# Altium PCB CurrentTrans-board-multi.PcbDoc
Units mil, origin at the board's own origin, x right, y up, seen from the top; angles counter-clockwise.
Board outline 4937.01 x 9323.82 mil, 2 copper layers (Top Layer, Bottom Layer); 11 components, 11 nets, 55 pads, 0 vias.
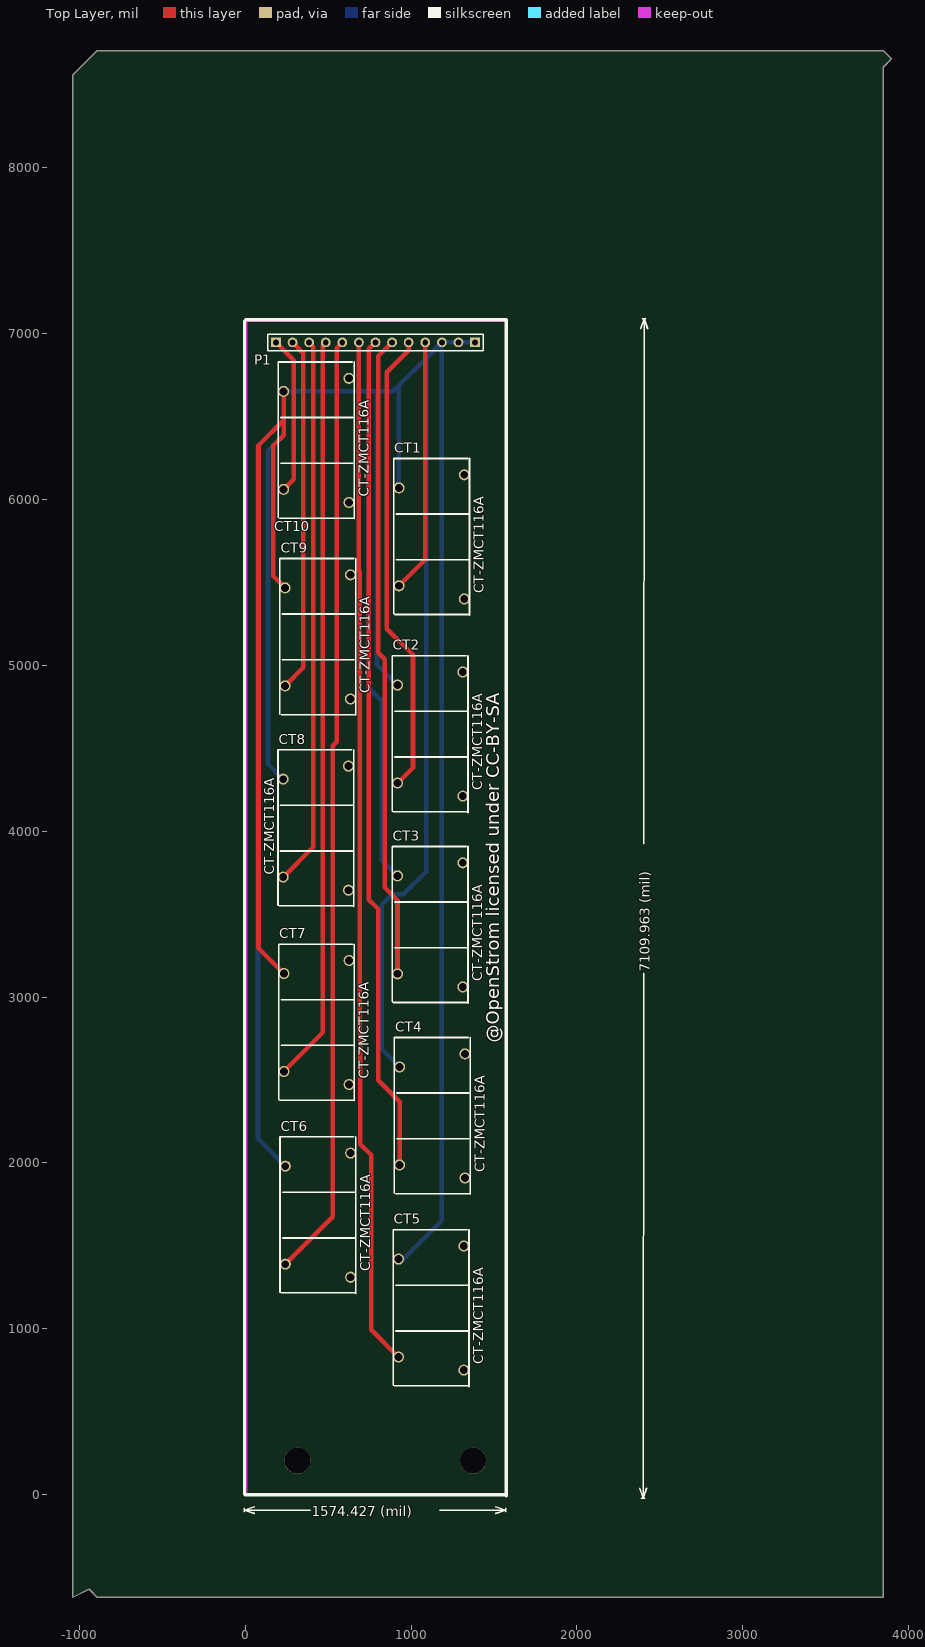
[diagram p0: Top Layer view]
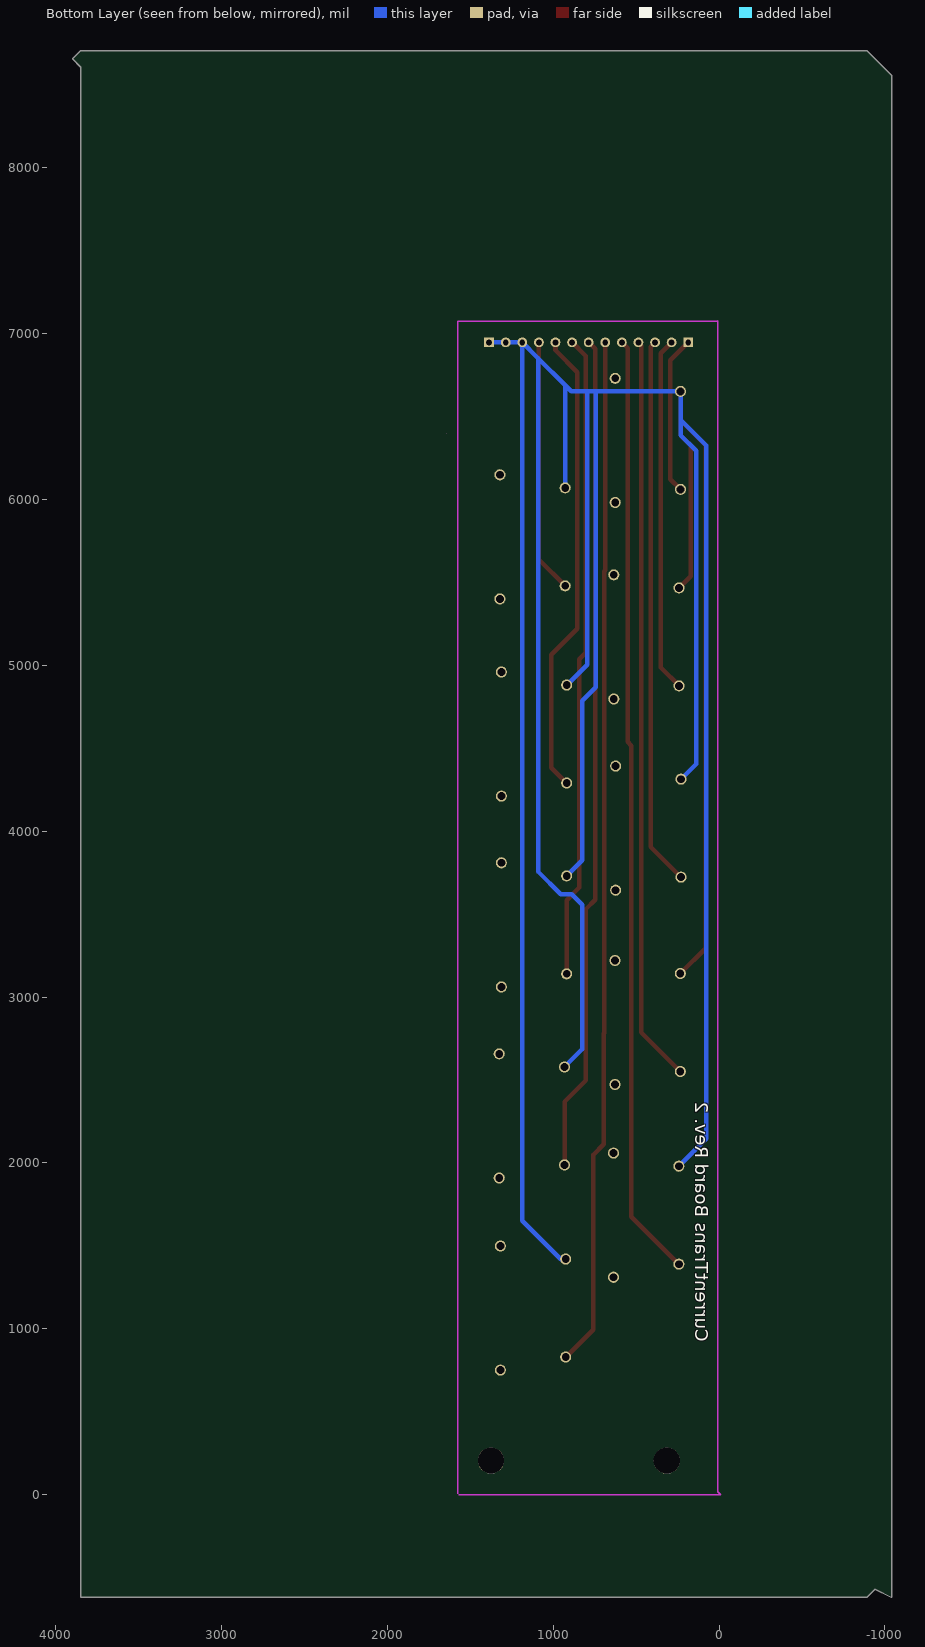
[diagram p1: Bottom Layer view, seen from below]

## Layer stack, top to bottom
Top Layer: signal copper 1.4
Dielectric: dielectric 12.6, FR-4, Dk 4.8
Bottom Layer: signal copper 1.4

## Board outline
-940.04,-569.61 -890.83,-618.82 3846.38,-618.82 3846.38,8604.61 3896.57,8654.8 3846.38,8705 -890.83,8705 -1040.43,8555.39 -1040.43,-618.82

## Design rules (kind name [scope] priority, off if disabled: settings)
Clearance [All] p1: gap=10
PolygonConnect [All] p1: connectstyle=Relief reliefconductorwidth=10 reliefentries=4 polygonreliefangle="90 Angle" airgapwidth=10
RoutingVias [All] p1: holewidth=28 width=50 viastyle="Through Hole" minholewidth=28 minwidth=50 maxholewidth=28 maxwidth=50
SilkToSilkClearance [All] p1 off: silktosilkclearance=10
SilkToSolderMaskClearance [IsPad] p1 off: minsilkscreentomaskgap=10 clearancetoexposedcopper=TRUE
SolderMaskExpansion [All] p1: expansion=4
Width [All] p1: maxlimit=78.74 minlimit=10 preferedwidth=27.56
26 further rules are at their usual default settings.

## Components (designator, comment, footprint, x,y, rotation, side; value= is the part's Value field where it differs from the comment)
CT1 "CurrentTransf" CT-ZMCT124 927.09,5478.62 r90 top
CT2 "CurrentTransf" CT-ZMCT124 918.23,4289.65 r90 top
CT3 "CurrentTransf" CT-ZMCT124 918.23,3140.04 r90 top
CT4 "CurrentTransf" CT-ZMCT124 931.02,1988.46 r90 top
CT5 "CurrentTransf" CT-ZMCT124 924.13,830 r90 top
CT6 "CurrentTransf" CT-ZMCT124 242.05,1390.04 r90 top
CT7 "CurrentTransf" CT-ZMCT124 233.19,2551.46 r90 top
CT8 "CurrentTransf" CT-ZMCT124 229.25,3722.72 r90 top
CT9 "CurrentTransf" CT-ZMCT124 240.63,4875.75 r90 top
CT10 "CurrentTransf" CT-ZMCT124 231.93,6060.04 r90 top
P1 "Header 13" HDR1X13 1385.63,6946.3 r180 top

## Footprints (in the part's own frame and the unit in brackets; to place one, negate y for a bottom-side part, rotate by r counter-clockwise, add the part's x,y. Pads: shape width x height; smd on the part's side, far side on the other; paste and mask are expansions set on the pad)
CT-ZMCT124 [mm] "current transformer"
  round 1.7 hole 1.2: 1(0,0) 2(15,0) 3(-2,-10) 4(17,-10)
  silkscreen extent -4.5,-10.8 19.5,0.8, body extent -4.63,-10.93 19.63,0.93, height 21
HDR1X13 [mm] "Connector; Header; 13 Position"
  rect 1.5x1.5 hole 0.9: 1(0,0) 13(30.48,0)
  round 1.5 hole 0.9: 2(2.54,0) 3(5.08,0) 4(7.62,0) 5(10.16,0) 6(12.7,0) 7(15.24,0) 8(17.78,0) 9(20.32,0) 10(22.86,0) 11(25.4,0) 12(27.94,0)
  silkscreen extent -1.27,-1.27 31.75,1.27

## Part data
P1: "Header, 13-Pin"

## Free pads (board coordinates)
  round 157.48 hole 157.48: 0(314.96,205.98) 0(1374.02,205.98)

## Nets (pads, with @x,y where several pads share a name; then routed paths per layer and width w, separated by ;. In a path a pad name is that pad's centre, name@x,y a point inside that pad or via, vN(x,y) a via of type N, cw(c..) or ccw(c..) an arc to the next point about the centre after c; other vN are vias at no path point)
NetCT1_1: CT1.1 P1.4 | length 1533.3
  Top Layer w27.56: CT1.1 1085.63,5637.17 P1.4
NetCT1_2: CT1.2 CT2.2 CT3.2 CT4.2 CT5.2 CT6.2 CT7.2 CT8.2 CT9.2 CT10.2 P1.1 P1.2 P1.3 | length 28570.6
  Top Layer w27.56: CT10.2 231.93,6475.67 ; CT7.2 80.63,3294.57 80.63,6324.37 231.93,6475.67 ; CT9.2 170.63,5536.3 170.63,6324.3 231.93,6385.6 231.93,6475.67
  Bottom Layer w27.56: CT8.2 137.72,4404.8 137.72,6292.6 231.93,6386.81 231.93,6478.62 ; CT6.2 77.68,2144.96 77.68,6324.37 231.93,6478.62 ; CT3.2 823.42,3825.4 823.42,4785.39 742.05,4866.77 742.05,6650.59 ; CT2.2 794.72,5003.7 794.72,6648.11 792.24,6650.59 ; CT5.2 953.66,1420.55 1185.63,1652.52 P1.3 ; CT1.2 927.09,6687.76 ; CT4.2 823.42,2686.62 823.42,3555.39 886.73,3618.7 952.99,3618.7 1090.73,3756.44 1090.73,6851.4 ; P1.1 P1.2 P1.3 ; 231.93,6478.62 CT10.2 742.05,6650.59 ; 742.05,6650.59 792.24,6650.59 ; 792.24,6650.59 889.92,6650.59 927.09,6687.76 ; 927.09,6687.76 1090.73,6851.4 ; 1090.73,6851.4 P1.3
NetCT2_1: CT2.1 P1.5 | length 2815
  Top Layer w27.56: CT2.1 1011.73,4383.15 1011.73,5062.28 854.25,5219.76 854.25,6766.02 985.63,6897.4 P1.5
NetCT3_1: CT3.1 P1.6 | length 3888
  Top Layer w27.56: P1.6 803.23,6863.9 803.23,5075.63 842.44,5036.42 842.44,3660.43 918.23,3584.65 CT3.1
NetCT4_1: CT4.1 P1.7 | length 5050.9
  Top Layer w27.56: P1.7 745.98,6906.65 745.98,3586.61 802.09,3530.51 802.09,2499.02 931.02,2370.08 CT4.1
NetCT5_1: CT5.1 P1.8 | length 6215.1
  Top Layer w27.56: P1.8 685.63,5571.3 691.63,5565.3 691.63,2782.3 693.63,2780.3 693.63,2113.65 758.92,2048.37 758.92,995.22 CT5.1
NetCT6_1: CT6.1 P1.9 | length 5698.6
  Top Layer w27.56: CT6.1 528.63,1676.62 528.63,4515.3 551.1,4537.77 551.1,6911.77 P1.9
NetCT7_1: CT7.1 P1.10 | length 4499.4
  Top Layer w27.56: CT7.1 468.43,2786.69 468.43,6929.09 P1.10
NetCT8_1: CT8.1 P1.11 | length 3309.7
  Top Layer w27.56: CT8.1 411.34,3904.8 411.34,6920.59 P1.11
NetCT9_1: CT9.1 P1.12 | length 2143.6
  Top Layer w27.56: CT9.1 351.3,4986.42 351.3,6880.63 P1.12
NetCT10_1: CT10.1 P1.13 | length 956.6
  Top Layer w27.56: P1.13 293.63,6838.3 293.63,6121.74 CT10.1
pads on no net: CT1.3 CT1.4 CT2.3 CT2.4 CT3.3 CT3.4 CT4.3 CT4.4 CT5.3 CT5.4 CT6.3 CT6.4 CT7.3 CT7.4 CT8.3 CT8.4 CT9.3 CT9.4 CT10.3 CT10.4

## Keep-outs
Keep-Out Layer:
  lines w7.87: 1567.91,0.98 -9.84,0.98 8.86,19.69 8.86,7077.76 14.76,7071.85 1574.8,7071.85 1574.8,7.87 ; 1639.69,6399.61 1639.69,6399.61

## Silkscreen, mask and mechanical layers (free items; w line width, h text height)
Top Overlay:
  lines w7.87: -3.94,7074.8 2.95,7081.69
  lines w10: -4.41,-102.95 -4.41,-82.95 ; 55.59,-112.95 -4.41,-92.95 ; 55.59,-72.95 -4.41,-92.95 ; 391.92,-92.95 -4.41,-92.95 ; 1173.68,-92.95 1570.02,-92.95 ; 1510.02,-112.95 1570.02,-92.95 ; 1510.02,-72.95 1570.02,-92.95 ; 1570.02,-102.95 1570.02,-82.95 ; 2379.29,39.4 2399.24,-20.61 ; 2385.1,7029.36 2405.15,7089.35 ; 2389.24,-20.61 2409.24,-20.62 ; 2395.15,7089.36 2415.15,7089.34 ; 2401.87,3143.49 2399.24,-20.61 ; 2402.52,3925.25 2405.15,7089.35 ; 2419.29,39.37 2399.24,-20.61 ; 2425.1,7029.33 2405.15,7089.35
  lines w20: -3.94,6.89 -3.94,7074.8 ; 0,0 1572.83,0 ; 2.95,7081.69 1572.83,7081.69 1572.83,-5.91
  text "7109.963 (mil)" at 2437.87,3153.46 h60 r89.95
  text "@OpenStrom licensed under CC-BY-SA" at 1531.42,2723.43 h78.74 r90
  text "1574.427 (mil)" at 401.92,-128.94 h60
Bottom Overlay:
  text "CurrentTrans Board Rev. 2" at 142.8,921.3 h78.74 r90
Top Solder:
  lines w7.87: -765.83,0 -762.87,-2.95

## Text inside footprints (layer, text, board x,y; h text height)
CT1: Top Overlay "CT-ZMCT116A" at 1438.9,5435.32 h60 r90
CT2: Top Overlay "CT-ZMCT116A" at 1430.04,4246.34 h60 r90
CT3: Top Overlay "CT-ZMCT116A" at 1430.04,3096.73 h60 r90
CT4: Top Overlay "CT-ZMCT116A" at 1442.83,1945.16 h60 r90
CT5: Top Overlay "CT-ZMCT116A" at 1435.94,786.69 h60 r90
CT6: Top Overlay "CT-ZMCT116A" at 753.86,1346.73 h60 r90
CT7: Top Overlay "CT-ZMCT116A" at 745,2508.15 h60 r90
CT8: Top Overlay "CT-ZMCT116A" at 174.25,3738.27 h60 r90
CT9: Top Overlay "CT-ZMCT116A" at 752.44,4832.44 h60 r90
CT10: Top Overlay "CT-ZMCT116A" at 743.74,6016.73 h60 r90